# Altium PCB pir.PcbDoc
Units mm, origin at the board's own origin, x right, y up, seen from the top; angles counter-clockwise.
Board outline 45 x 45 mm, 2 copper layers (Top Layer, Bottom Layer); 5 components, 59 nets, 18 pads, 0 vias.
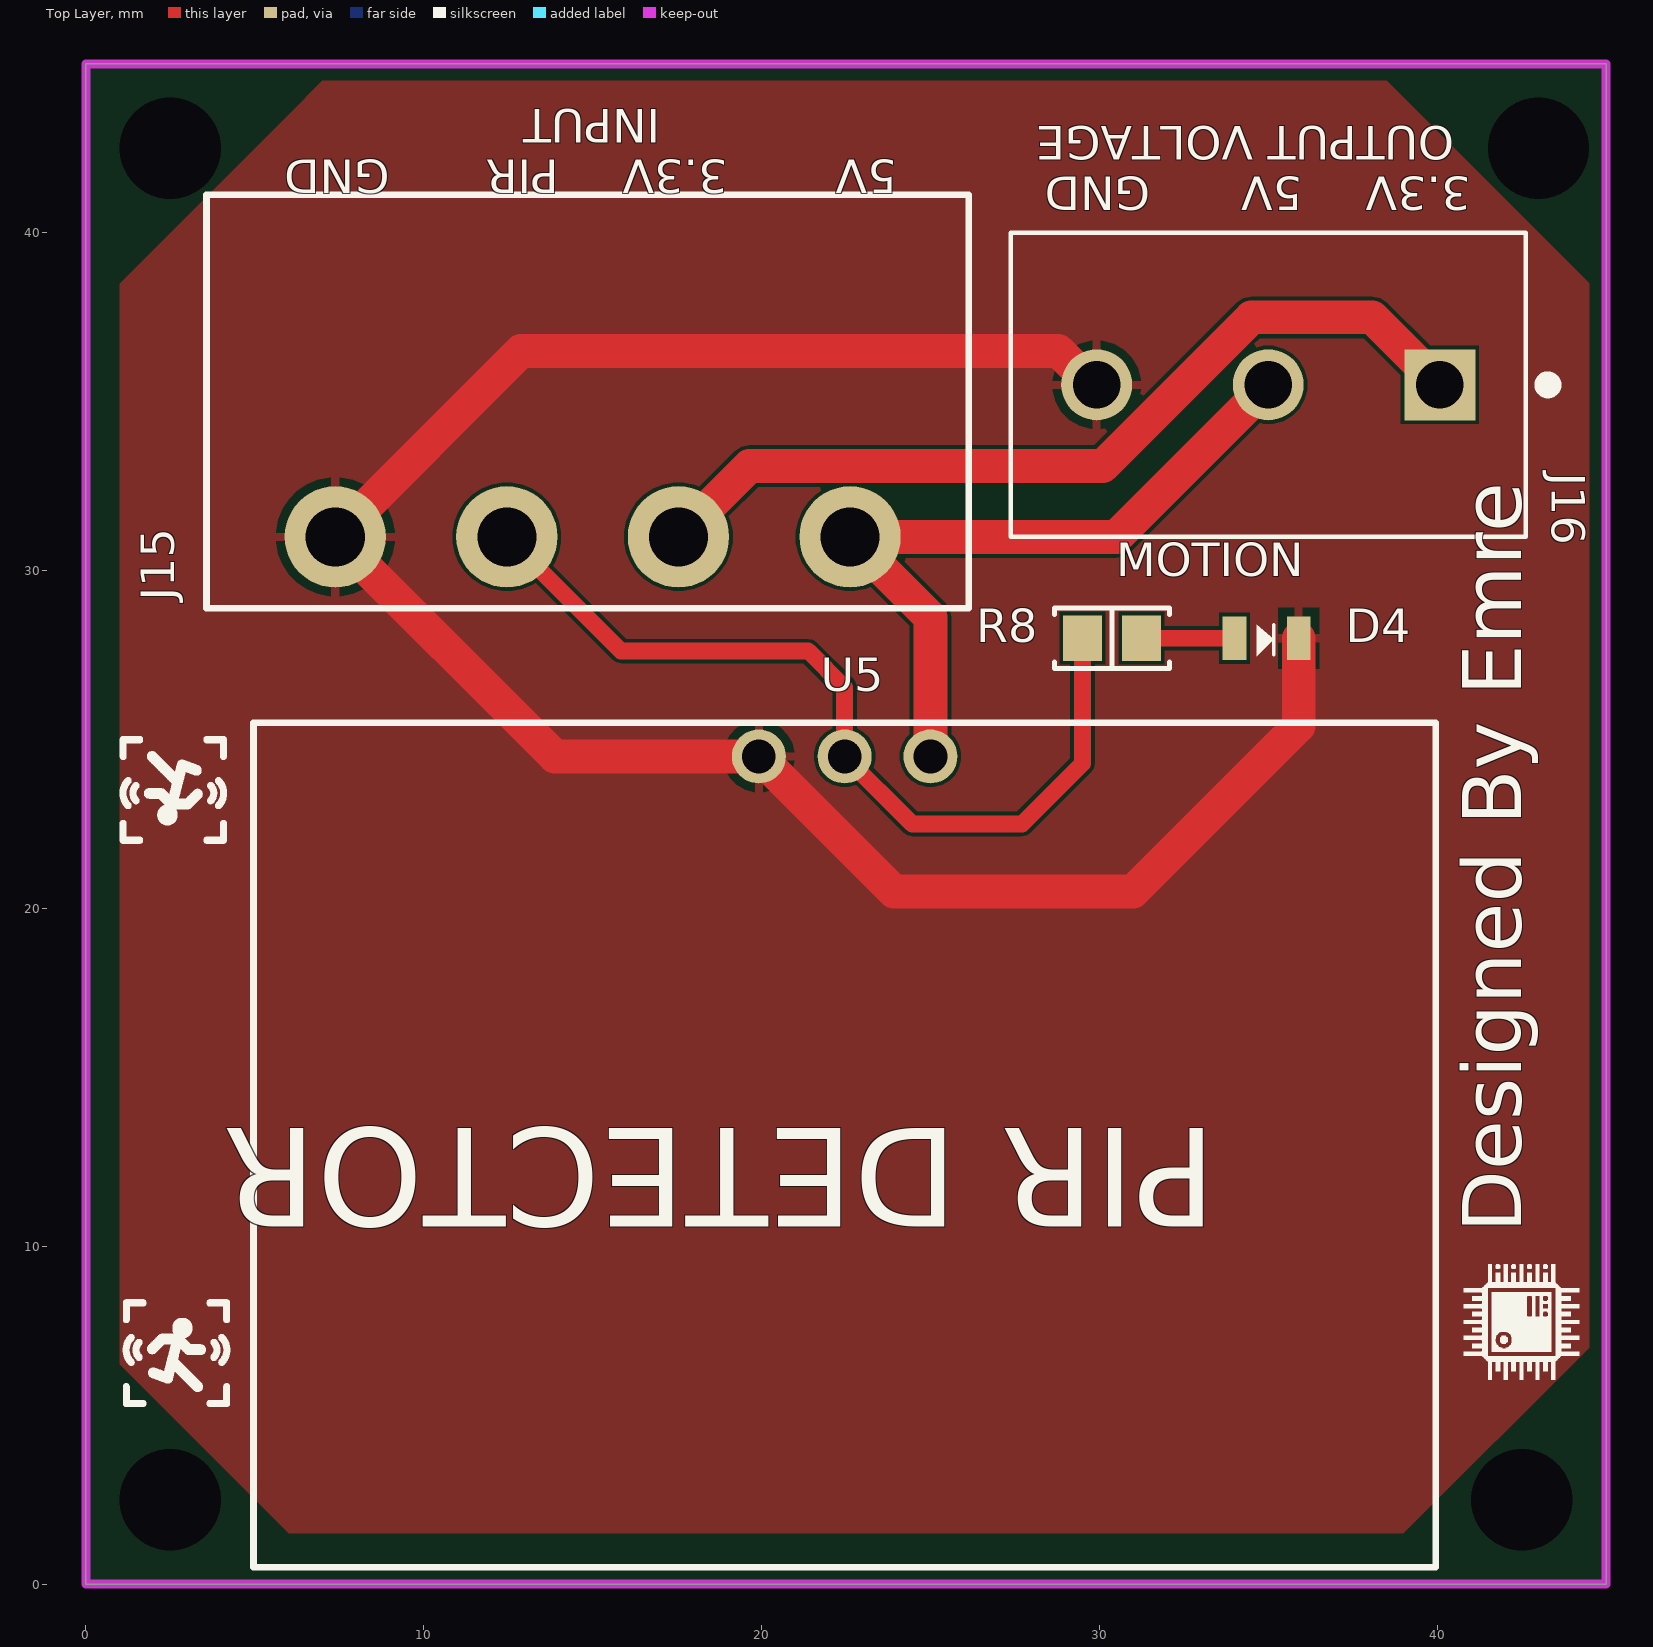
[diagram p0: Top Layer view]
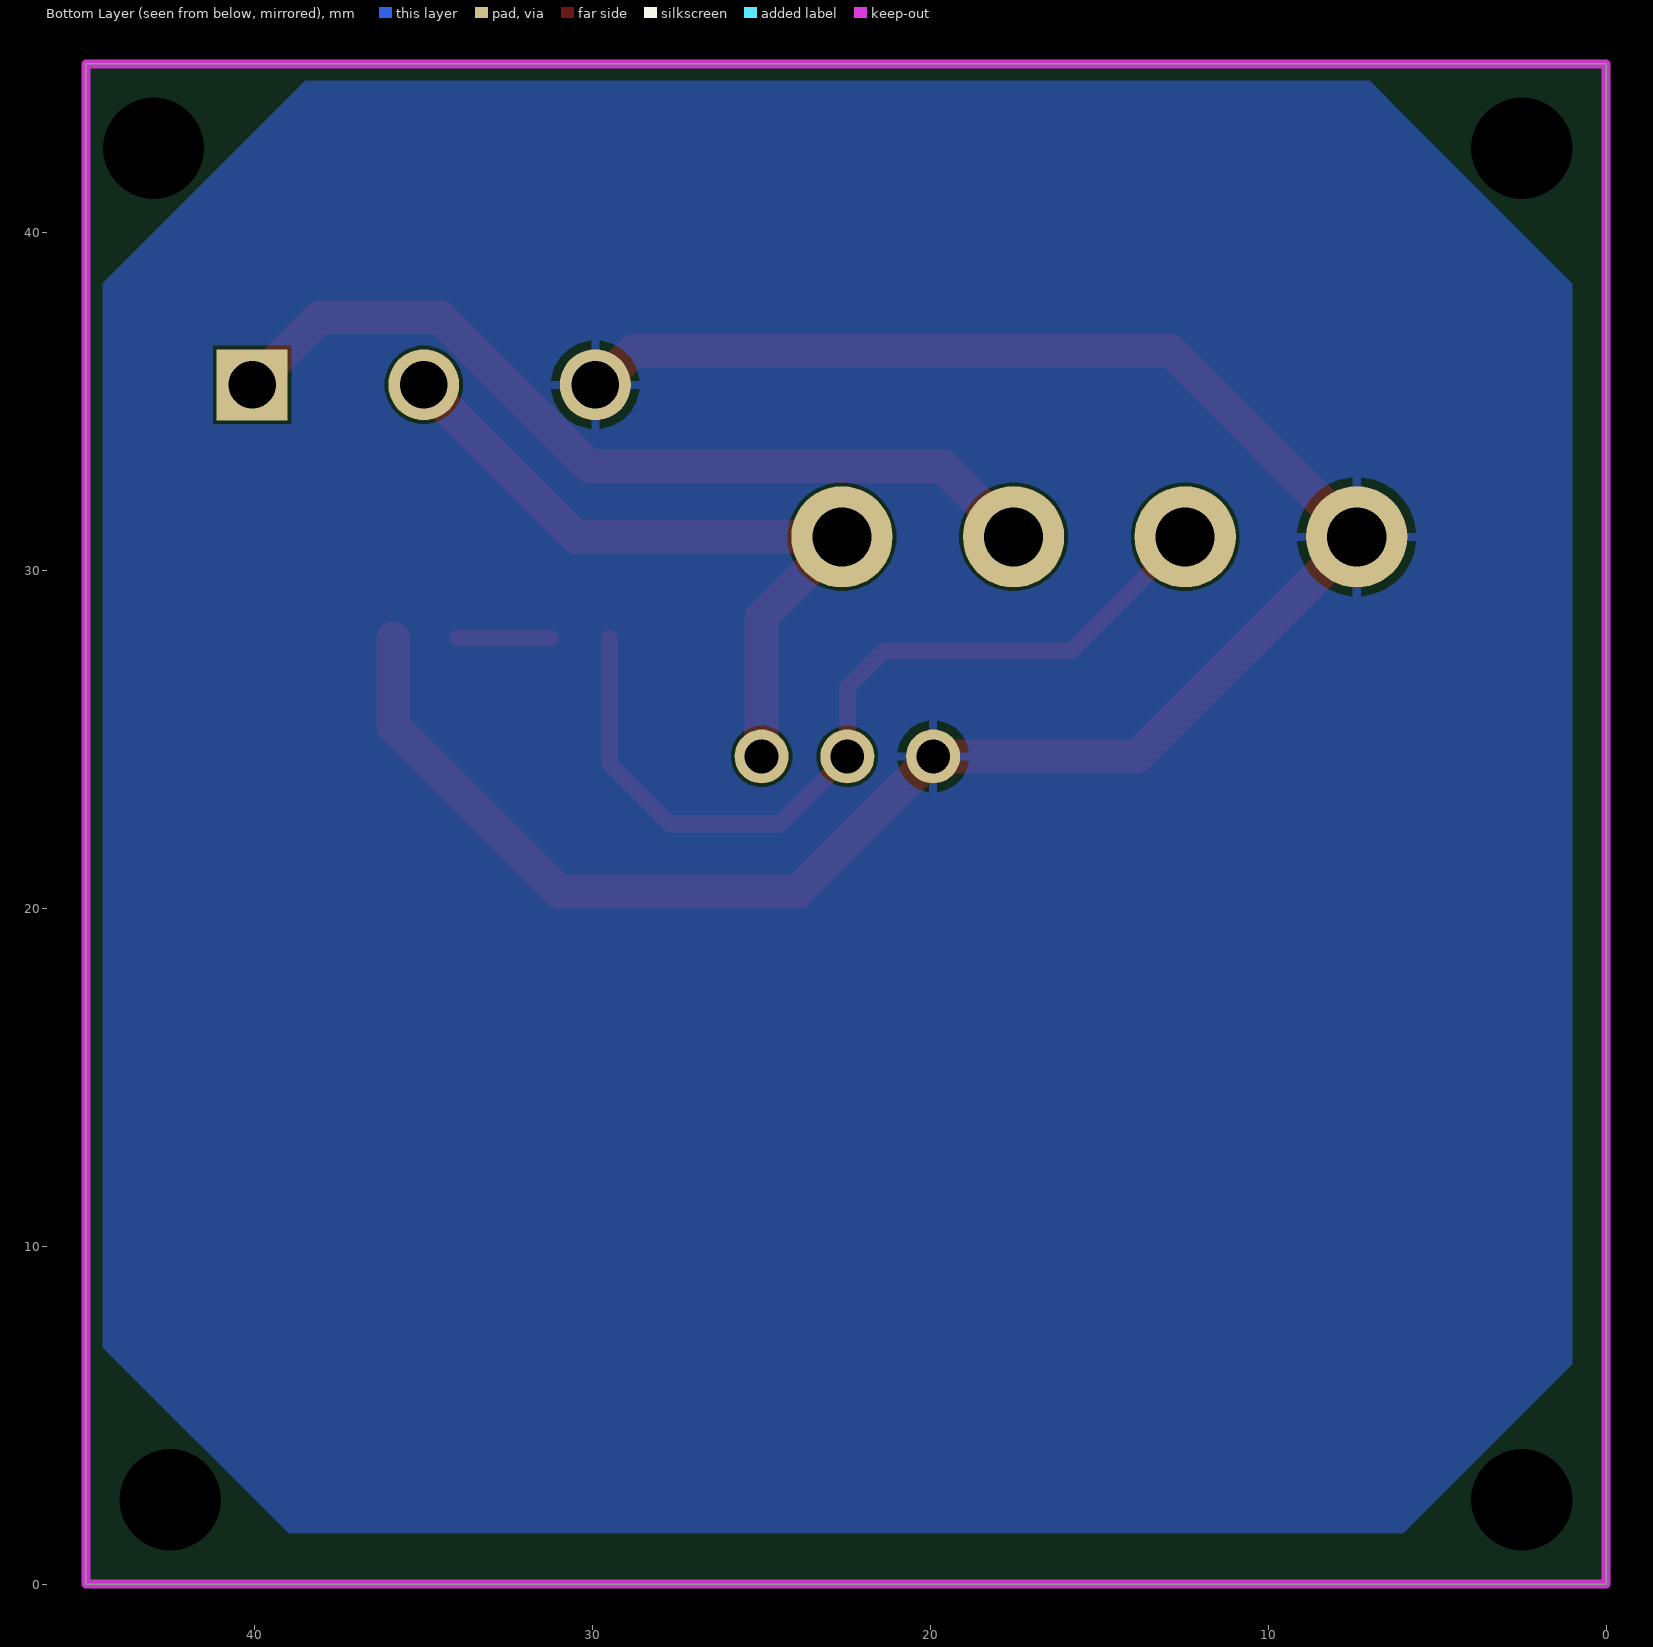
[diagram p1: Bottom Layer view, seen from below]
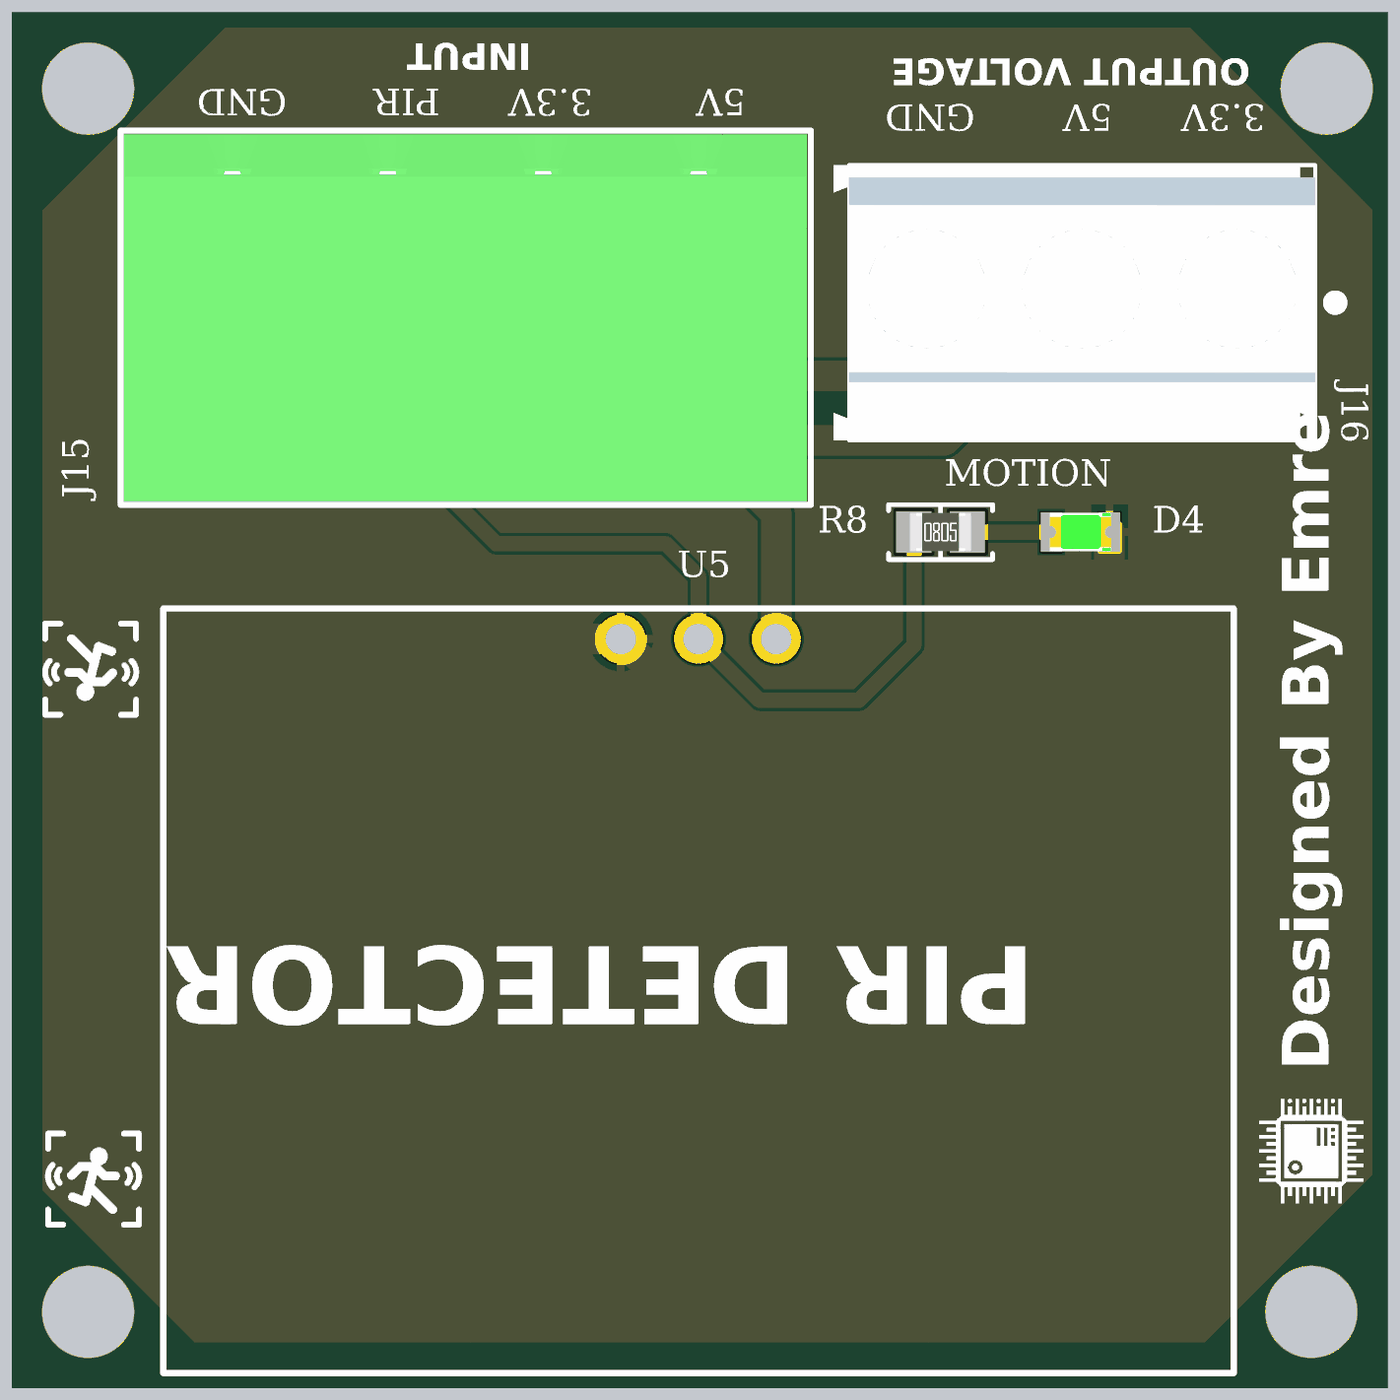
[diagram p2: 3D render of the assembled board from above, using the file's embedded part models]

## Layer stack, top to bottom
Top Solder: solder mask 0.0102, Solder Resist, Dk 3.5
Top Layer: signal copper 0.0356
Dielectric 1: dielectric 0.32, FR-4, Dk 4.8
Bottom Layer: signal copper 0.0356
Bottom Solder: solder mask 0.0102, Solder Resist, Dk 3.5

## Board outline
0,0 0,45 45,45 45,0

## Design rules (kind name [scope] priority, off if disabled: settings)
Clearance [All] p1: gap=0.102 ignorepadtopadclearanceinfootprint=FALSE
HoleSize [All] p1: absolutevalues=TRUE maxlimit=3 minlimit=0.025 maxpercent=80.000 minpercent=20.000
PolygonConnect [All] p1: connectstyle=Relief reliefconductorwidth=0.254 reliefentries=4 polygonreliefangle="90 Angle" airgapwidth=0.254
RoutingVias [All] p1: holewidth=0.25 width=0.6 viastyle="Through Hole" minholewidth=0.2 minwidth=0.45 maxholewidth=1 maxwidth=1.6
SilkToSilkClearance [All] p1: silktosilkclearance=0.1
SilkToSolderMaskClearance [IsPad] p1: minsilkscreentomaskgap=0.09 clearancetoexposedcopper=TRUE
SolderMaskExpansion [All] p1: expansion=0.102 istentingtop=FALSE
Width [All] p1: maxlimit=1 minlimit=0.102 preferedwidth=0.3
27 further rules are at their usual default settings.

## Components (designator, comment, footprint, x,y, rotation, side; value= is the part's Value field where it differs from the comment)
D4 "LTST-C171GKT" LED_GREEN_0805 34.95,28 r180 top
J15 "1757268" CONNECTOR_4Pin 15,31 r180 top
J16 "282841-3" CONNECTOR_3Pin 35,35.5 r180 top
R8 "330 Ohms" "RES 0805_2012" 30.375,28 r0 top
U5 "PIR_SENSOR_MODULE" PIR_SENSOR_MODULE 22.46,24.5 r180 top

## Footprints (in the part's own frame and the unit in brackets; to place one, negate y for a bottom-side part, rotate by r counter-clockwise, add the part's x,y. Pads: shape width x height; smd on the part's side, far side on the other; paste and mask are expansions set on the pad)
CONNECTOR_3Pin [mm]
  rect 2.1x2.1 / inner round 2.1 / far side rect 2.1x2.1 hole 1.4: 1(-5.08,0)
  round 2.1 hole 1.4: 2(0,0) 3(5.08,0)
  silkscreen extent -8.48,-4.5 7.62,4.5, body extent -7.62,-4.5 8.12,4.5, height 15.2
CONNECTOR_4Pin [mm]
  round 3 hole 1.75 mask+0.05: 1(-7.62,0) 2(-2.54,0) 3(2.54,0) 4(7.62,0)
  silkscreen extent -11.13,-10.12 11.43,2.11, body extent -11,-10 11.32,2, height 8.57
LED_GREEN_0805 [mm]
  rect 0.7x1.3 smd mask+0.05: 1(-0.95,0) 2(0.95,0)
  silkscreen extent -0.22,-0.41 0.29,0.54, body extent -1.01,-0.63 1.01,0.63, height 1.1
PIR_SENSOR_MODULE [mm]
  round 1.6 hole 1 mask+0.05: 1(-2.54,0) 2(0,0) 3(2.54,0)
  silkscreen extent -17.5,-1 17.5,24
"RES 0805_2012" [mm] "Chip Resistor, 2-Leads, Body 2.00x1.25mm, IPC Medium Density"
  rect 1.15x1.35 smd: 1(-0.875,0) 2(0.875,0)
  silkscreen extent -1.7,-0.9 1.7,0.9, body extent -1,-0.62 1,0.63, height 0.6

## Part data
D4: library part "LED GREEN 0805", "Green 569nm LED Indication - Discrete 2.1V 0805 (2012 Metric)", Case Code (Metric)=2012, Case Code (Imperial)=0805, Color=Green, Forward Current=30mA, Forward Voltage=2.1V, Lens Color=Colorless, Manufacturer="Vishay Lite-On", Max Operating Temperature=85°C, Min Operating Temperature=-55°C, Package Quantity=1, Power Dissipation=100mW, Reverse Voltage=5V, Supplier Part Number 1=160-1423-1-ND, Test Current=10mA, Case/Package=0805, Category=LEDs, ComponentLink1Description=https://datasheet.ciiva.com/2110/ltst-c171gkt-2110000.pdf?src-supplier=Digi-Key, ComponentLink1URL=https://datasheet.ciiva.com/2110/ltst-c171gkt-2110000.pdf?src-supplier=Digi-Key, ComponentLink2Description=https://datasheet.ciiva.com/11773/0900766b80dc0296-11773991.pdf?src-supplier=RSComponents, ComponentLink2URL=https://datasheet.ciiva.com/11773/0900766b80dc0296-11773991.pdf?src-supplier=RSComponents, ComponentLink3Description=https://datasheet.ciiva.com/12400/lite-on-ltst-c171gkt-190133-12400647.pdf?src-supplier=Mouser, ComponentLink3URL=https://datasheet.ciiva.com/12400/lite-on-ltst-c171gkt-190133-12400647.pdf?src-supplier=Mouser, ComponentLink4Description=https://datasheet.ciiva.com/2110/ltst-c171gkt-2110001.pdf?src-supplier=Digi-Key, ComponentLink4URL=https://datasheet.ciiva.com/2110/ltst-c171gkt-2110001.pdf?src-supplier=Digi-Key, ComponentLink5Description=https://datasheet.ciiva.com/2110/ltst-c171gkt-2110002.pdf?src-supplier=Digi-Key, ComponentLink5URL=https://datasheet.ciiva.com/2110/ltst-c171gkt-2110002.pdf?src-supplier=Digi-Key, ComponentLink6Description=https://datasheet.ciiva.com/16396/ltst-c171gkt-16396549.pdf?src-supplier=Future+Electronics, ComponentLink6URL=https://datasheet.ciiva.com/16396/ltst-c171gkt-16396549.pdf?src-supplier=Future+Electronics, Depth=1.25mm, Designed by=EMRE, Dominant Wavelength=569nm, Height=0.8mm, Lead Free="Lead Free", Length=2mm, Lens Style=Diffused,Colorless,Rectangular,Clear, Lens Transparency=Clear, Luminous Intensity=12mcd, Manufacturer Part Number=LTST-C171GKT, Mount="Surface Mount", Number of Elements=1, Number of LEDs=1, Number of Pins=2, Packaging="Tape and Reel", Power Rating=100mW, Pricing 1="1=0,26000, 10=0,14100, 100=0,06560, 500=0,06060, 1000=0,04747 (USD)", Radiation Hardening=No, RoHS=Yes, RoHS Compliant=Yes, Series="CHIPLED 0805", Stock 1=498344, Supplier 1=Digi-Key, Viewing Angle=130°, Wavelength=585nm, Width=1.25mm, Illumination Color=Green
J15: library part CONNECTOR_4Pin, "Terminal Header; 12 A; 5.08 mm; 4; Solder Mount; 1.4 mm; 4 kV; 250 V; PBT", Color=Green, Current=15A, Current Rating=12A, Flammability Rating="UL94 V-0", Manufacturer="Phoenix Contact", Package Quantity=50, Supplier Part Number 1=277-1108-ND, Voltage=300V, Voltage Rating=250V, Approvals=UL,CSA, Category="Terminal Blocks", ComponentLink1Description=https://datasheet.ciiva.com/16096/1757268-16096406.pdf?src-supplier=Onlinecomponents.com, ComponentLink1URL=https://datasheet.ciiva.com/16096/1757268-16096406.pdf?src-supplier=Onlinecomponents.com, ComponentLink2Description=https://datasheet.ciiva.com/15197/getdatasheetpartid-176352-15197330.pdf?src-supplier=Verical, ComponentLink2URL=https://datasheet.ciiva.com/15197/getdatasheetpartid-176352-15197330.pdf?src-supplier=Verical, ComponentLink3Description=https://datasheet.ciiva.com/795/1757268-795434.pdf?src-supplier=Digi-Key, ComponentLink3URL=https://datasheet.ciiva.com/795/1757268-795434.pdf?src-supplier=Digi-Key, ComponentLink4Description=https://datasheet.ciiva.com/7630/1697153-7630841.pdf?src-supplier=Element14, ComponentLink4URL=https://datasheet.ciiva.com/7630/1697153-7630841.pdf?src-supplier=Element14, ComponentLink5Description=https://datasheet.ciiva.com/29210/569323-da-01-en-grundgehaeuse-1757268-250-st-29210575.pdf?src-supplier=Conrad, ComponentLink5URL=https://datasheet.ciiva.com/29210/569323-da-01-en-grundgehaeuse-1757268-250-st-29210575.pdf?src-supplier=Conrad, ComponentLink6Description=https://datasheet.ciiva.com/16703/70054631-16703596.pdf?src-supplier=Allied+Electronics, ComponentLink6URL=https://datasheet.ciiva.com/16703/70054631-16703596.pdf?src-supplier=Allied+Electronics, Connector Type=Plug, Contact Material=Tin, Contact Plating=Tin, Depth=12mm, Gender=Male, Height=12.1mm, Housing Color=Green, Housing Material=Polybutylene, Lead Free="Lead Free", Length=22.32mm, Manufacturer Part Number=1757268, Max Current Rating=12A, Mount="Through Hole", Number of Contacts=4, Number of Levels=1, Number of Poles=4, Number of Positions=4, Number of Positions Per Level=4, Number of Rows=1, Orientation="Right Angle", Packaging=Bulk, Pitch=5.08mm, Pricing 1="1=1,62, 10=1,484, 50=1,419, 100=1,3803, 250=1,29, 500=1,1868, 1000=1,0965, 2500=1,0449, 5000=0,9804 (USD)", Reach SVHC Compliant=No, RoHS=Yes, RoHS Compliant=Yes, Series=MSTBA, Stock 1=17192, Supplier 1=Digi-Key, Termination=Solder, Voltage Rating (DC)=250V, Weight=5.396916oz, Width=22.24mm
J16: library part CONNECTOR_3Pin, "Conn Terminal Block 3 POS 5.08mm Solder ST Thru-Hole 17.5A/Contact", Color=Green, Current=17.5A, Flammability Rating="UL94 V-0", Manufacturer="TE Connectivity", Max Operating Temperature=105°C, Max Supply Voltage (AC)=300V, Min Operating Temperature=-40°C, Package Quantity=200, Supplier Part Number 1=A98343-ND, Category="Terminal Blocks", Closed End="No (Without)", ComponentLink1Description=https://datasheet.ciiva.com/26824/getdatasheetpartid-155857-26824002.pdf?src-supplier=Verical, ComponentLink1URL=https://datasheet.ciiva.com/26824/getdatasheetpartid-155857-26824002.pdf?src-supplier=Verical, ComponentLink2Description=https://datasheet.ciiva.com/23766/eng-cd-282841-h6-23766144.pdf?src-supplier=Newark, ComponentLink2URL=https://datasheet.ciiva.com/23766/eng-cd-282841-h6-23766144.pdf?src-supplier=Newark, ComponentLink3Description=https://datasheet.ciiva.com/30238/eng-cs-1308389-eurostyle-terminal-blocks-0607-30238440.pdf?src-supplier=Onlinecomponents.com, ComponentLink3URL=https://datasheet.ciiva.com/30238/eng-cs-1308389-eurostyle-terminal-blocks-0607-30238440.pdf?src-supplier=Onlinecomponents.com, ComponentLink4Description=https://datasheet.ciiva.com/823/eng-cd-282841-h6-823465.pdf?src-supplier=Digi-Key, ComponentLink4URL=https://datasheet.ciiva.com/823/eng-cd-282841-h6-823465.pdf?src-supplier=Digi-Key, Connector Type=Receptacle, Contact Material=Brass, Contact Plating=Tin, Current Rating=17.5A, Depth=9mm, ELV=Compliant, Housing Color=Green, Housing Material=Polyamide, Lead Free="Lead Free", Length=15.24mm, Manufacturer Part Number=282841-3, Max Current Rating=17.5A, Max Voltage Rating (AC)=300V, Mount="Through Hole", Number of Circuits=3, Number of Contacts=3, Number of Levels=1, Number of Poles=3, Number of Positions=3, Number of Positions Per Level=3, Number of Rows=1, Orientation=Straight, Packaging=Carton, Pitch=5.08mm, Plating=Brass, Pricing 1="1=1,53, 10=1,401, 25=1,3596, 50=1,346, 100=1,2493, 250=1,22864, 500=1,1182, 1000=1,00085, 5000=0,89732 (USD)", Radiation Hardening=No, Reach SVHC Compliant=Unknown, RoHS=Yes, RoHS Compliant=Yes, Screw Flange="No (Without)", Screwless Terminal Block="Yes (With)", Series=Buchanan, Side Stackable="No (Without)", Stock 1=17891, Supplier 1=Digi-Key, Tail Length=3.5mm, Termination=Solder, Thread Size=M3, Voltage=300V, Voltage Rating=300V, Wire Gauge (Max)=30AWG, Wire Gauge (Min)=30AWG, Wire/Cable Gauge=30AWG, Interlock="Yes (With)"
R8: library part ESR10EZPJ331, "RES SMD 330 OHM 5% 0.4W 0805", Device Package="0805 (2012 Metric)", Manufacturer="Rohm Semiconductor", Operating Temperature="-55°C ~ 155°C", Power (Watts)="0.4W, 2/5W", Ratings=AEC-Q200, Supplier Device Package=0805, Supplier Part Number 1=RHM330KCT-ND, Temperature Coefficient=±200ppm/°C, Tolerance=±5%, ComponentLink1Description=Datasheet, ComponentLink1URL=https://www.rohm.com/datasheet/ESR01MZPF/esr-e, ComponentLink2Description="DigiKey Link", ComponentLink2URL=https://www.digikey.com/en/products/detail/rohm-semiconductor/ESR10EZPJ331/1762807, Composition="Thick Film", Features="Automotive AEC-Q200, Pulse Withstanding", Height - Seated (Max)="0.026\" (0.65mm)", LastUpdated="1.05.2023 19:42:01", Lifecycle Status=Active, Minimum Order=1, Number of Terminations=2, Package / Case="0805 (2012 Metric)", Packaging=TapeAndReel, Part Number=ESR10EZPJ331, Part Status=Active, PartId=32307, Price=0.01, Resistance="330 Ohms", Series=ESR, Size / Dimension="0.079\" L x 0.049\" W (2.00mm x 1.25mm)", Supplier 1=DigiKey

## Free pads (board coordinates)
  rect 0x0 hole 3 mask+0.05: ""(2.5,2.5) ""(2.5,42.5) ""(42.5,2.5) ""(43,42.5)

## Nets (pads, with @x,y where several pads share a name; then routed paths per layer and width w, separated by ;. In a path a pad name is that pad's centre, name@x,y a point inside that pad or via, vN(x,y) a via of type N, cw(c..) or ccw(c..) an arc to the next point about the centre after c; other vN are vias at no path point)
3V3DC: 
3V3DC_P: J15.2 J16.1 | length 26.1
  Top Layer w1: J15.2 19.642,33.102 30.102,33.102 34.5,37.5 38.08,37.5 J16.1
3V3DC_R: 
5VDC: 
5VDC_P: J15.1 J16.2 U5.1 | length 21.7
  Top Layer w1: U5.1 25,28.62 J15.1 30.5,31 J16.2
5VDC_R: 
12VDC: 
BUTTON: 
BUTTON_R: 
BUZZER: 
BUZZER_R: 
D12: 
D13: 
D14: 
D15: 
D32: 
D33: 
D34: 
D35: 
EN: 
GND: 
GND_P: D4.1 J15.4 J16.3 U5.3 | length 62.7
  Top Layer w1: J16.3 29.784,35.5 28.784,36.5 12.88,36.5 J15.4 13.88,24.5 U5.3 23.92,20.5 31,20.5 35.9,25.4 D4.1
GND_R: 
IRQ: 
IRQ_R: 
LED_BUTTON: 
LED_BUTTON_R: 
LED_KIRMIZI: 
LED_KIRMIZI_R: 
LED_YESIL: 
LED_YESIL_R: 
MISO: 
MISO_R: 
MOSI: 
MOSI_R: 
NetD1_2: 
NetD2_2: 
NetD3_2: 
NetD4_2: D4.2 R8.2 | length 2.8
  Top Layer w0.5: R8.2 D4.2
NetD5_2: 
NetD6_2: 
NetD7_2: 
NetF1_2: 
NetR3_1: 
PIR_SENSOR: 
PIR_SENSOR_P: J15.3 R8.1 U5.2 | length 26.2
  Top Layer w0.5: J15.3 15.844,27.616 21.384,27.616 22.46,26.54 U5.2 24.46,22.5 27.707,22.5 29.5,24.293 R8.1
RST: 
RST_R: 
RX0: 
RX2: 
SCK: 
SCK_R: 
SDA: 
SDA_R: 
TX0: 
TX2: 
VIN: 
VN: 
VP: 

## Polygon pours and split planes (outlines as drawn)
GND_P on Bottom Layer "GND_P_L02_P000" (solid, remove dead copper, pour order 0): 6,43.5 2,39.5 1,38.5 1,6.5 6,1.5 39,1.5 44.5,7 44.5,38.515 38.515,44.5 7,44.5
GND_P on Top Layer "GND_P_L01_P001" (solid, remove dead copper, pour order 1): 6,43.5 2,39.5 1,38.5 1,6.5 6,1.5 39,1.5 44.5,7 44.5,38.515 38.515,44.5 7,44.5

## Keep-outs
Keep-Out Layer:
  the board outline again, w0.254

## Silkscreen, mask and mechanical layers (free items; w line width, h text height)
Top Overlay:
  drawing of 2913 lines, arcs and shapes, not listed
  text "INPUT" at 17,43.984 h1.7 r180
  text "OUTPUT VOLTAGE" at 40.5,43.484 h1.7 r180
  text "GND" at 9,42.487 h1.7 r180
  text "PIR" at 14,42.495 h1.7 r180
  text "3.3V" at 19,42.487 h1.7 r180
  text "5V" at 24,42.487 h1.7 r180
  text "GND" at 31.5,41.987 h1.7 r180
  text "5V" at 36,41.987 h1.7 r180
  text "3.3V" at 41,41.987 h1.7 r180
  text "MOTION" at 30.5,29.513 h1.7
  text "Designed By Emre" at 43.061,10.401 h3 r90
Drill Drawing:
  the board outline again, w0.2

## Dimensions
0,0 to 0,45 on Drill Drawing
0,0 to 45,0 on Drill Drawing

## Text inside footprints (layer, text, board x,y; h text height)
U5: Top Overlay "PIR DETECTOR" at 33.46,14.454 h5 r180